# Altium PCB Adafruit Trellis 4x4 3mm HT16K33.PcbDoc
Units mil, origin at the board's own origin, x right, y up, seen from the top; angles counter-clockwise.
Board outline 2362.2 x 2362.2 mil, 2 copper layers (Top, Bottom), stack 61.811 mil thick; 42 components, 39 nets, 187 pads, 63 vias.
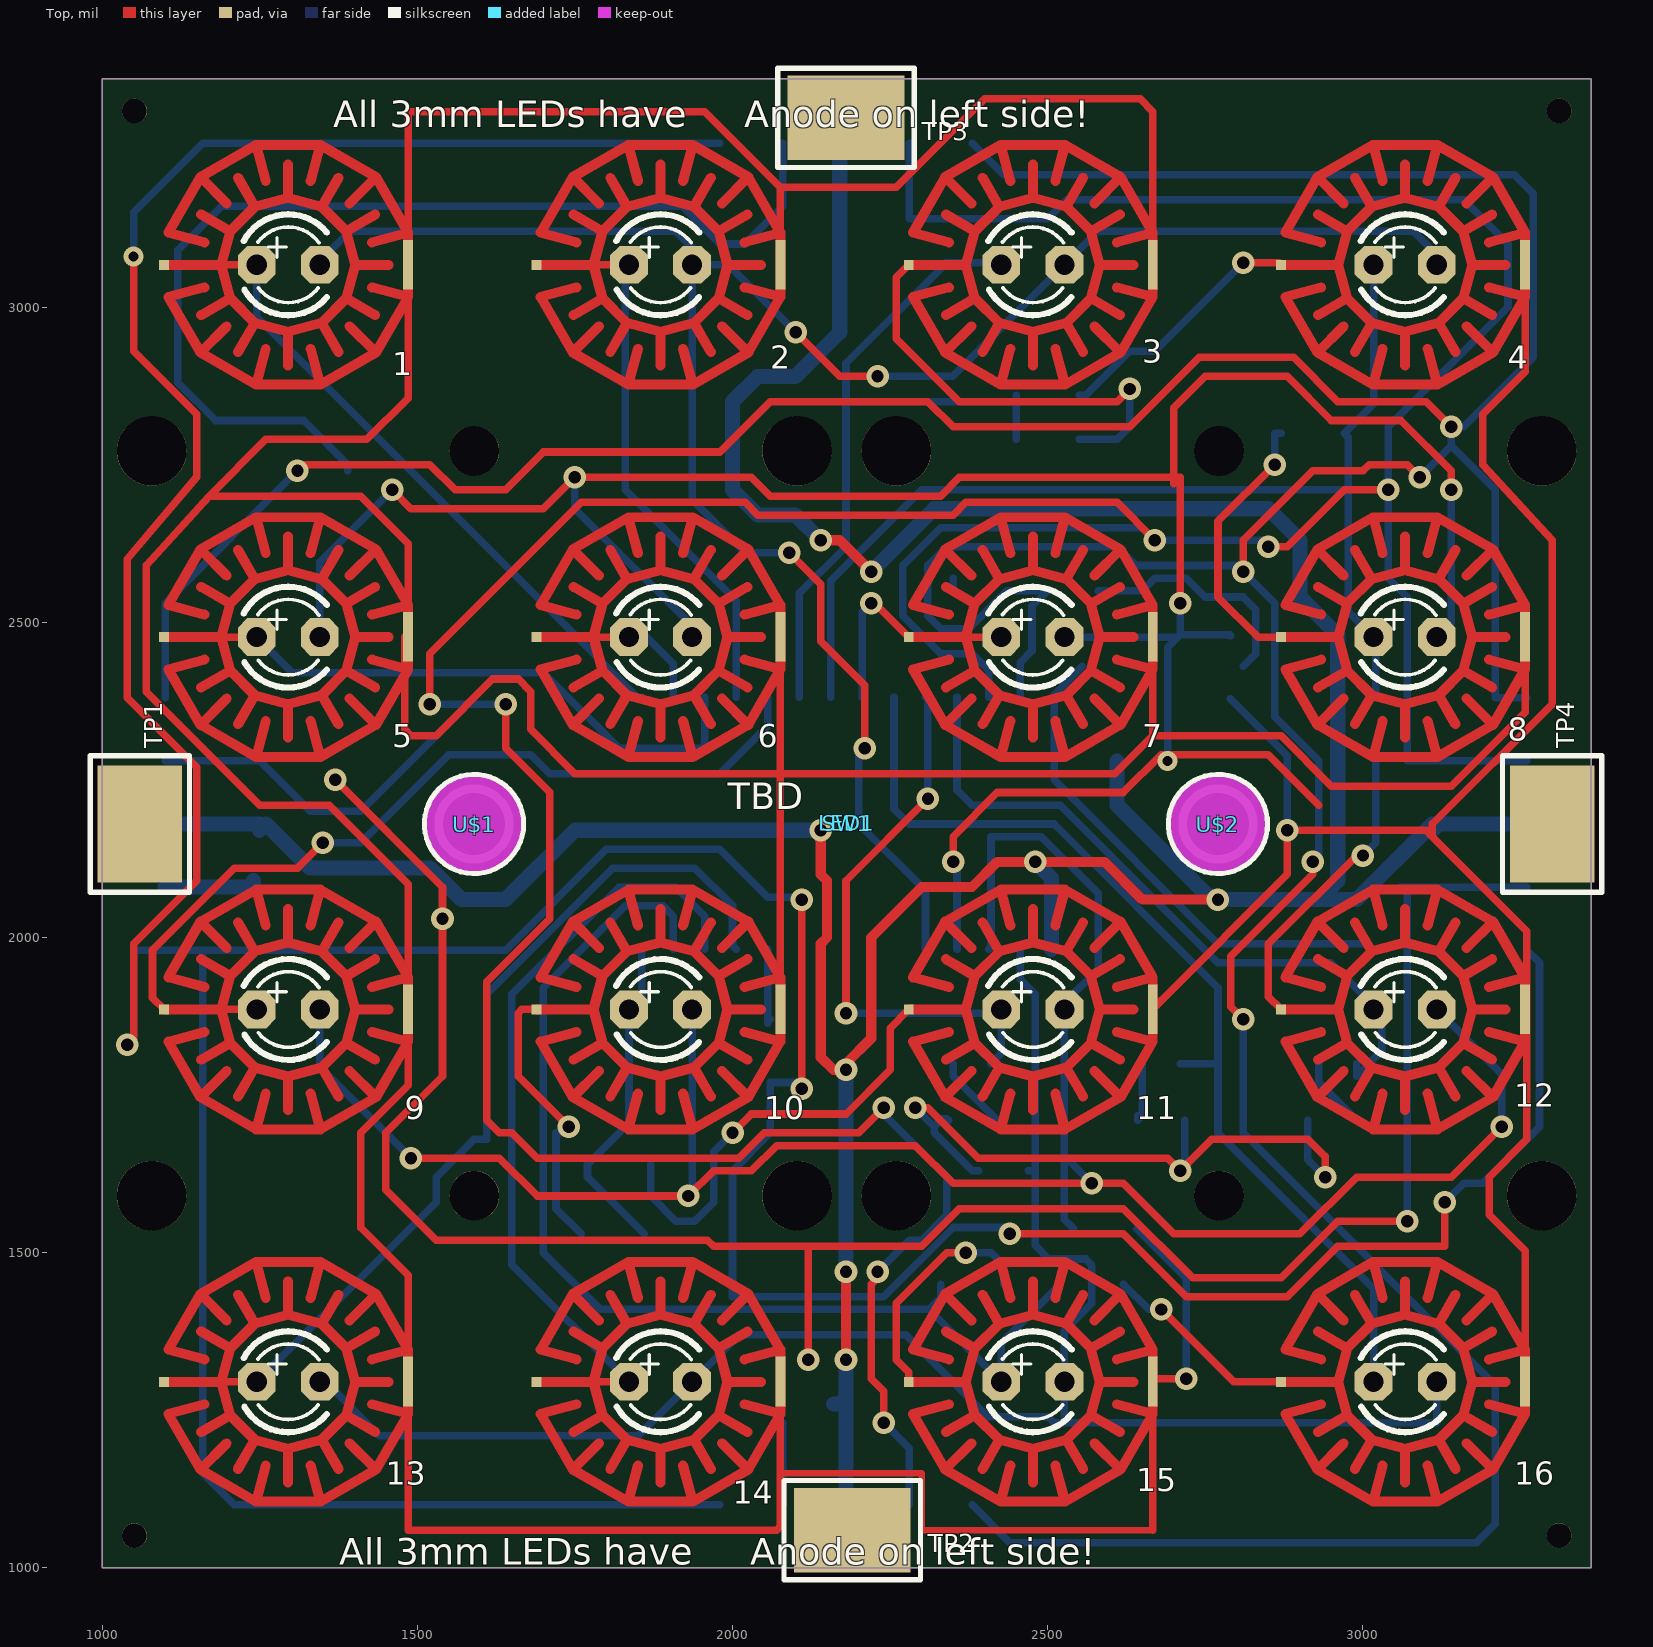
[diagram p0: Top view]
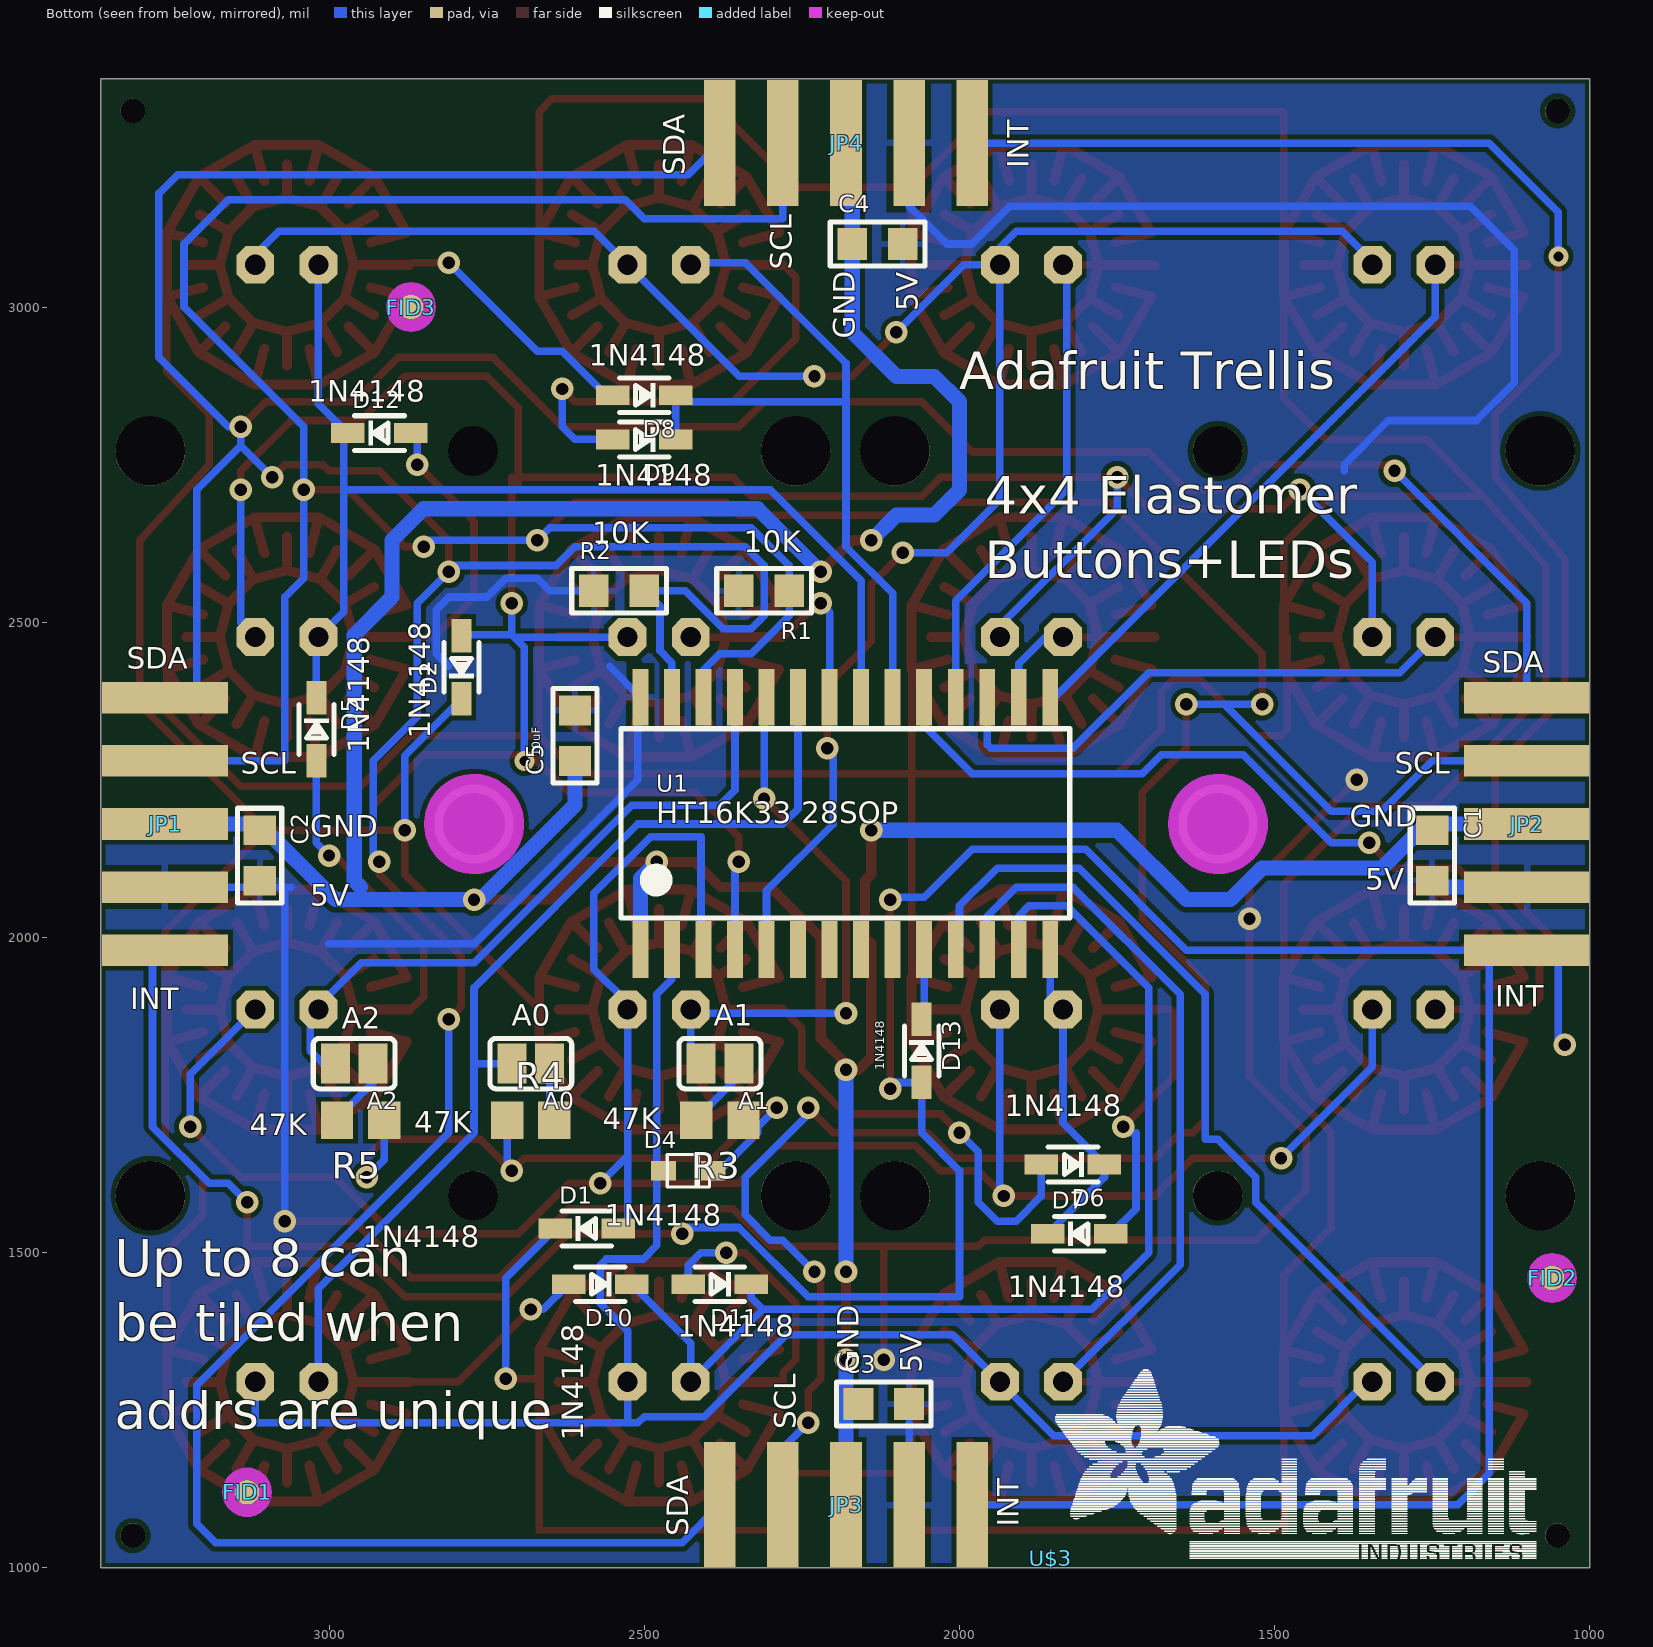
[diagram p1: Bottom view, seen from below]

## Layer stack, top to bottom
Top Solder: solder mask 0.4, Solder Resist, Dk 3.5
Top: signal copper 1.378
Dielectric 1: core 59.0551, FR-4, Dk 4.8
Bottom: signal copper 1.378
Bottom Solder: solder mask 0.4, Solder Resist, Dk 3.5

## Board outline
1000,1000 3362.2,1000 3362.2,3362.2 1000,3362.2

## Design rules (kind name [scope] priority, off if disabled: settings)
Clearance [All] p1: gap=8 except(0: SMDPad-SMDPad SMDPad-THPad SMDPad-Via)
Clearance "Clearance (Same Net)" [All] p2: gap=0 except(8: SMDPad-SMDPad SMDPad-THPad SMDPad-Via)
HoleSize HoleSize_1 [All] p1: absolutevalues=TRUE maxlimit=100000 minlimit=15.5 maxpercent=80.000 minpercent=20.000
HoleSize [All] p2: absolutevalues=TRUE maxlimit=100 minlimit=1 maxpercent=80.000 minpercent=20.000
HoleToHoleClearance mdViaViaSameLayer [All] p1: gap=8 allowstackedmicrovias=TRUE
HoleToHoleClearance [All] p2: gap=10 allowstackedmicrovias=TRUE
PasteMaskExpansion mlMinCreamFrame [All] p1: expansion=0
PasteMaskExpansion [All] p2: expansion=0
PolygonConnect ThermalVias [IsVia] p1: connectstyle=Direct reliefconductorwidth=10 reliefentries=4 polygonreliefangle="90 Angle" airgapwidth=10
PolygonConnect [All] p2: connectstyle=Relief reliefconductorwidth=10 reliefentries=4 polygonreliefangle="90 Angle" airgapwidth=10
RoutingVias [All] p1: holewidth=28 width=50 viastyle="Through Hole" minholewidth=28 minwidth=50 maxholewidth=28 maxwidth=50
SilkToSilkClearance [All] p1 off: silktosilkclearance=10
SilkToSolderMaskClearance [IsPad] p1 off: minsilkscreentomaskgap=10 clearancetoexposedcopper=TRUE
SolderMaskExpansion mlMinStopFrame [All] p1: expansion=4
SolderMaskExpansion [All] p2: expansion=4
Width Width_1 [All] p1: maxlimit=100000 minlimit=8 preferedwidth=10
Width [All] p2: maxlimit=10 minlimit=10 preferedwidth=10
25 further rules are at their usual default settings.

## Components (designator, comment, footprint, x,y, rotation, side; value= is the part's Value field where it differs from the comment)
A0 "" SOLDERJUMPER_REFLOW_NOPASTE 2680,1800 r0 bottom
A1 "" SOLDERJUMPER_REFLOW_NOPASTE 2380,1800 r0 bottom
A2 "" SOLDERJUMPER_REFLOW_NOPASTE 2960,1800 r0 bottom
C1 "" _0805 1250,2130 r270 bottom
C2 "" _0805 3110,2130 r270 bottom
C3 "" _0805 2120,1260 r180 bottom
C4 "" _0805 2130,3100 r180 bottom
C5 "10uF" _0805 2610,2320 r90 bottom
D1 "1N4148" SOD-323 2591.34,1538.27 r180 bottom
D2 "1N4148" SOD-323 2789.84,2428.66 r90 bottom
D4 "1N4148" SOD-323F 2430,1630 r180 bottom
D5 "1N4148" SOD-323 3020,2330 r270 bottom
D6 "1N4148" SOD-323 1820,1640 r0 bottom
D7 "1N4148" SOD-323 1810,1530 r180 bottom
D8 "1N4148" SOD-323 2500,2860 r0 bottom
D9 "1N4148" SOD-323 2500,2790 r0 bottom
D10 "1N4148" SOD-323 2570,1450 r0 bottom
D11 "1N4148" SOD-323 2380,1450 r0 bottom
D12 "1N4148" SOD-323 2920,2800 r180 bottom
D13 "1N4148" SOD-323 2060,1820 r270 bottom
FID1 "" FIDUCIAL_1MM 3130,1120 r180 bottom
FID2 "" FIDUCIAL_1MM 1060,1460 r180 bottom
FID3 "" FIDUCIAL_1MM 2870,3000 r180 bottom
JP1 "" 1X5_SMT 3260,2180 r90 bottom
JP2 "" 1X5_SMT 1100,2180 r90 bottom
JP3 "" 1X5_SMT 2180,1100 r0 bottom
JP4 "" 1X5_SMT 2180,3260 r0 bottom
LED1 "TBD" LED3MM-4X4GRID 2181.1,2181.1 r180 top
R1 "10K" _0805 2310,2550 r0 bottom
R2 "10K" _0805 2540,2550 r180 bottom
R3 "47K" R0805 2380,1710 r0 bottom
R4 "47K" R0805 2680,1710 r180 bottom
R5 "47K" R0805 2950,1710 r0 bottom
SW1 "" ELAST_PAD_SQUARE_10MM_5.4MM_4X4GRID 2181.1,2181.1 r180 top
TP1 "" TESTPOINT_SMT 1060,2180 r90 top
TP2 "" TESTPOINT_SMT 2190,1060 r0 top
TP3 "" TESTPOINT_SMT 2180,3300 r0 top
TP4 "" TESTPOINT_SMT 3300,2180 r90 top
U1 "HT16K33 28SOP" SOP28_300MIL 2181.1,2181.1 r180 bottom
U$1 "" MOUNTINGHOLE_2.5_PLATED 1590,2180 r0 top
U$2 "" MOUNTINGHOLE_2.5_PLATED 2770,2180 r0 top
U$3 "" ADAFRUIT_TEXT_20MM 1855,1015 r180 bottom

## Footprints (in the part's own frame and the unit in brackets; to place one, negate y for a bottom-side part, rotate by r counter-clockwise, add the part's x,y. Pads: shape width x height; smd on the part's side, far side on the other; paste and mask are expansions set on the pad)
1X5_SMT [mil] "1X5_SMT"
  rect 50x200 smd: 1(-200,0) 2(-100,0) 3(0,0) 4(100,0) 5(200,0)
_0805 [mil] "_0805"
  rect 47.24x51.18 smd: 1(-40,0) 2(40,0)
  silkscreen extent -75,-35 75,35
ADAFRUIT_TEXT_20MM [mil] "ADAFRUIT_TEXT_20MM"
  silkscreen extent 6,0 771,300
ELAST_PAD_SQUARE_10MM_5.4MM_4X4GRID [mm] "ELAST_PAD_SQUARE_10MM_5.4MM_4X4GRID"
  round 1 hole 1: 1(-28.7,28.7) 1(-28.7,-28.7) 1(28.7,28.7) 1(28.7,-28.7)
  round 2.8 hole 2.8: 1(-28,-15) 1(-28,15) 1(-2,15) 1(-2,-15) 1(2,15) 1(2,-15) 1(28,-15) 1(28,15)
  round 2 hole 2: 1(-15,15) 1(-15,-15) 1(15,15) 1(15,-15)
  rect 0.4x0.4 smd: A1(-17.5,-22.5) A2(-2.5,-22.5) A3(12.5,-22.5) A4(27.5,-22.5) A5(-17.5,-7.5) A6(-2.5,-7.5) A7(12.5,-7.5) A8(27.5,-7.5) A9(-17.5,7.5) A10(-2.5,7.5) A11(12.5,7.5) A12(27.5,7.5) A13(-17.5,22.5) A14(-2.5,22.5) A15(12.5,22.5) A16(27.5,22.5)
  rect 0.4x2 smd: B1(-27.33,-22.51) B2(-12.33,-22.51) B3(2.67,-22.51) B4(17.67,-22.51) B5(-27.33,-7.51) B6(-12.33,-7.51) B7(2.67,-7.51) B8(17.67,-7.51) B9(-27.33,7.49) B10(-12.33,7.49) B11(2.67,7.49) B12(17.67,7.49) B13(-27.33,22.49) B14(-12.33,22.49) B15(2.67,22.49) B16(17.67,22.49)
  Top drawing of 752 lines, arcs and shapes, not listed
FIDUCIAL_1MM [mm] "FIDUCIAL_1MM"
  rrect100% 1x1 smd: 1(0,0)
  Top keep-out lines w0.5: 0.75,0 ccw(c0,0) 0,0.75 ccw(c0,0) -0.75,0 ccw(c0,0) 0,-0.75 ccw(c0,0) 0.75,0
LED3MM-4X4GRID [mil] "LED3MM-4X4GRID"
  oct 60x60 hole 32: A1(-835.83,-885.83) A2(-245.28,-885.83) A3(345.28,-885.83) A4(935.83,-885.83) A5(-835.83,-295.28) A6(-245.28,-295.28) A7(345.28,-295.28) A8(935.83,-295.28) A9(-835.83,295.28) A10(-245.28,295.28) A11(345.28,295.28) A12(935.83,295.28) A13(-835.83,885.83) A14(-245.28,885.83) A15(345.28,885.83) A16(935.83,885.83) K1(-935.83,-885.83) K2(-345.28,-885.83) K3(245.28,-885.83) K4(835.83,-885.83) K5(-935.83,-295.28) K6(-345.28,-295.28) K7(245.28,-295.28) K8(835.83,-295.28) K9(-935.83,295.28) K10(-345.28,295.28) K11(245.28,295.28) K12(835.83,295.28) K13(-935.83,885.83) K14(-345.28,885.83) K15(245.28,885.83) K16(835.83,885.83)
  silkscreen extent -947,-966 956,966
MOUNTINGHOLE_2.5_PLATED [mil] "MOUNTINGHOLE_2.5_PLATED"
  round 125.98 hole 98.43: P$1(0,0)
  Top keep-out circle w80: c0,0 r39.37
  Bottom keep-out circle w80: c0,0 r39.37
  silkscreen extent -79,-79 79,79
R0805 [mil] "R0805"
  rect 51.18x59.06 smd: 1(-37.4,0) 2(37.4,0)
SOD-323 [mil] "SOD-323"
  rect 53.15x31.5 smd: A(50,0) C(-50,0)
  silkscreen extent -39,-28 39,28
SOD-323F [mm] "SOD-323F"
  rect 1x0.8 smd: A(-1,0) C(1,0)
  silkscreen extent -0.85,-0.65 0.85,0.65
SOLDERJUMPER_REFLOW_NOPASTE [mil] "SOLDERJUMPER_REFLOW_NOPASTE"
  rect 46x63 smd: 1(-30,0) 2(30,0)
  silkscreen extent -65,-40 65,40
SOP28_300MIL [mil] "SOP28_300MIL"
  rect 25x90 smd: P$1(-325,-200) P$2(-275,-200) P$3(-225,-200) P$4(-175,-200) P$5(-125,-200) P$6(-75,-200) P$7(-25,-200) P$8(25,-200) P$9(75,-200) P$10(125,-200) P$11(175,-200) P$12(225,-200) P$13(275,-200) P$14(325,-200) P$15(325,200) P$16(275,200) P$17(225,200) P$18(175,200) P$19(125,200) P$20(75,200) P$21(25,200) P$22(-25,200) P$23(-75,200) P$24(-125,200) P$25(-175,200) P$26(-225,200) P$27(-275,200) P$28(-325,200)
  silkscreen extent -356,-150 356,150
TESTPOINT_SMT [mm] "TESTPOINT_SMT"
  rect 4.7x3.4 smd: P$1(0,0)
  silkscreen extent -2.75,-2 2.75,2

## Part data
A0 A1 A2: library part SOLDERJUMPER_REFLOW_NOPASTE
C1 C2 C3 C4 C5 R1 R2: library part _0805
D1 D2 D5 D6 D7 D8 D9 D10 D11 D12 D13: library part SOD-323
D4: library part SOD-323F
FID1 FID2 FID3: library part FIDUCIAL_1MM
JP1 JP2 JP3 JP4: library part 1X5_SMT
LED1: library part LED3MM-4X4GRID
R3 R4 R5: library part R0805
SW1: library part ELAST_PAD_SQUARE_10MM_5.4MM_4X4GRID
TP1 TP2 TP3 TP4: library part TESTPOINT_SMT
U1: library part SOP28_300MIL
U$1 U$2: library part MOUNTINGHOLE_2.5_PLATED
U$3: library part ADAFRUIT_TEXT_20MM

## Via types
v1: diameter 35.69/35.69 (per signal layer), hole 19.69, Top to Bottom, 61 vias
v2: diameter 31.5/31.5 (per signal layer), hole 15.5, Top to Bottom, 2 vias

## Nets (pads, with @x,y where several pads share a name; then routed paths per layer and width w, separated by ;. In a path a pad name is that pad's centre, name@x,y a point inside that pad or via, vN(x,y) a via of type N, cw(c..) or ccw(c..) an arc to the next point about the centre after c; other vN are vias at no path point)
COM0: D4.A LED1.K13 LED1.K14 LED1.K15 LED1.K16 U1.P$2 | length 2857.7
  Bottom w12: LED1.K16 1354.72,1295.28 1440,1210 1850.55,1210 LED1.K15 2010.55,1370 2275,1370 2405,1240 2500,1240 2510,1230 2526.38,1230 ; U1.P$2 2456.1,1933.9 2480,1910 D4.A@2480,1630 ; D4.A D4.A@2480,1630 ; LED1.K13 3116.93,1230 2526.38,1230 ; D4.A@2480,1630 2480,1511.65 2501.65,1490 2560,1490 2570,1480 2570,1420 2526.38,1376.38 LED1.K14 2526.38,1230
COM1: D1.A LED1.K9 LED1.K10 LED1.K11 LED1.K12 U1.P$3 | length 3748.6
  Top w12: v1(1490,1650) 1630,1650 1690,1590 v1(1930,1590) 1970,1630 2030,1630 2070,1670 2290,1670 2350,1610 v1(2570,1610) 2620,1610 2700,1530 2900,1530 2990,1620 3140,1620 v1(3220,1700)
  Bottom w12: LED1.K12 1345.28,1795.28 1490,1650.55 v1(1490,1650) ; v1(1930,1590) 1935.83,1595.83 LED1.K11 ; U1.P$3 2410,1985 2410,2160 2490,2160 2580,2070 2580,1950 2526.38,1896.38 LED1.K10 2526.38,1653.62 ; D1.A 2526.38,1553.23 2526.38,1653.62 ; v1(2570,1610) 2526.38,1653.62 ; LED1.K9 3220,1782.76 v1(3220,1700)
COM2: D2.A LED1.K5 LED1.K6 LED1.K7 LED1.K8 U1.P$4 | length 4427
  Top w12: v1(1460,2710) 1490,2680 1700,2680 v1(1750,2730) 2030,2730 2060,2700 2330,2700 2360,2730 2710,2730 ; v1(2350,2120) 2350,2160 2420,2230 2620,2230 2680,2290 v2@2690,2290 ; v2(2690,2280) v2@2690,2290 ; v1(2710,2530) 2710,2730 ; 2930,2210 2850,2290 v2@2690,2290 ; v1(3140,2710) 3140,2740 3060,2820 2950,2820 2880,2890 2750,2890 2700,2840 2700,2720 2710,2730
  Bottom w12: LED1.K8 1345.28,2595.28 v1(1460,2710) ; v1(1750,2730) 1750,2680 1935.83,2494.17 LED1.K7 ; v1(2350,2120) 2356.1,2113.9 U1.P$4 ; LED1.K6 2706.38,2476.38 ; v2(2690,2280) 2690,2460 2706.38,2476.38 ; v1(2710,2530) 2710,2480 ; D2.A 2788.5,2480 2710,2480 ; LED1.K5 3140,2499.45 v1(3140,2710) ; 2706.38,2476.38 2710,2480
COM3: LED1.K1 LED1.K2 LED1.K3 LED1.K4 U1.P$5 | length 3330.6
  Top w12: v1(2090,2610) 2140,2560 2140,2470 2210,2400 v1(2210,2300) ; v1(2100,2960) 2170,2890 v1(2230,2890)
  Bottom w12: LED1.K4 1340,3066.93 1393.07,3120 1910,3120 1935.83,3094.17 LED1.K3 ; v1(2090,2610) 2020,2610 1935.83,2694.17 LED1.K3 ; v1(2100,2960) 1993.07,3066.93 LED1.K3 ; v1(2210,2300) 2200,2290 2200,2180 2306.1,2073.9 U1.P$5 ; v1(2230,2890) 2349.45,2890 LED1.K2 2579.45,3120 3080,3120 3116.93,3083.07 LED1.K1
GND: C1.1 C2.1 C3.1 C4.1 C5.1 JP1.3 JP2.3 JP3.3 JP4.3 U1.P$1 | length 6397.5
  Top w16: v1(2140,2170) 2140,2100 2150,2090 2150,2000 2140,1990 2140,1810 2160,1790 v1(2180,1790) 2180,1800 2220,1840 2220,2000 2300,2080 2380,2080 2420,2120 v1(2480,2120) 2590,2120 2650,2060 v1(2770,2060) ; v1(2140,2630) 2170,2630 v1(2220,2580) ; v1(2180,1330) v1(2180,1470)
  Bottom w12: C1.1@1250,2180 C1.1@1260,2180 ; JP4.3@2170,3250 JP4.3
  Bottom w16: 2950,2060 2950,2080
  Bottom w24: JP2.3 1250,2180 C1.1 ; C1.1@1260,2180 1330,2110 1520,2110 1570,2060 1640,2060 1750,2170 v1(2140,2170) ; v1(2140,2630) 2100,2670 2040,2670 2000,2710 2000,2850 2040,2890 2100,2890 2170,2960 C4.1 JP4.3@2170,3250 ; C3.1 2170,1260 C3.1@2180,1270 ; JP3.3 C3.1@2180,1270 ; v1(2180,1330) C3.1@2180,1270 ; v1(2180,1470) v1(2180,1790) ; v1(2220,2580) 2320,2680 2850,2680 2900,2630 2900,2540 2960,2480 2960,2090 2950,2080 ; v1(2480,2120) 2506.1,2093.9 U1.P$1 ; C5.1 2610,2210 2760,2060 v1(2770,2060) 2950,2060 2990,2060 3110,2180 C2.1@3120,2180 ; C2.1 C2.1@3120,2180 ; JP1.3 C2.1@3120,2180
INT: D13.A JP1.1 JP2.1 JP3.1 JP4.1 | length 7983.9
  Top w12: v1(1040,1830) 1050,1840 1050,1990 1150,2090 1150,2270 1040,2380 1040,2600 1150,2730 1150,2830 1050,2930 v2(1050,3080) ; v1(2110,1760) v1(2110,2060) ; v1(2440,1530) 2620,1530 2720,1430 2880,1430 2960,1510 3130,1510 v1(3130,1580)
  Bottom w12: v1(1040,1830) 1050,1840 1050,1980 JP2.1 JP2.1@1160,1980 ; v2(1050,3080) 1050,3150 1160,3260 JP4.1 ; JP3.1 1210,1100 1160,1150 JP2.1@1160,1980 ; v1(2110,1760) 2100,1770 D13.A 2060,1690 2000,1630 2000,1430 2240,1430 2350,1540 2430,1540 v1(2440,1530) ; v1(2110,2060) 2106.1,2063.9 2056.1,2063.9 1980,2140 1800,2140 1640,1980 JP2.1@1160,1980 ; v1(3130,1580) 3160,1610 3190,1610 3280,1700 3280,1960 JP1.1
N$1: D2.C SW1.B1 SW1.B9 SW1.B10 SW1.B13 | length 2898.3
  Top w12: SW1.B10@2666.54,1896.54 SW1.B10 2680,1899.68 2680,1900 2880,2100 v1(2880,2170) 3100,2170 3110,2160 ; SW1.B13 3257.09,1502.91 3200,1560 3200,1620 3260,1680 3260,1883.31 SW1.B9 3260,1886.22 3260,2010 3110,2160 ; SW1.B1 3257.09,2897.09 3190,2830 3190,2750 3300,2630 3300,2370 3110,2180 3110,2160
  Bottom w12: D2.C 2880,2288.5 v1(2880,2170)
N$2: D13.C U1.P$10 | length 121.1
  Bottom w12: D13.C@2056.1,1863.9 D13.C@2056.1,1870 ; U1.P$10 D13.C@2056.1,1870 ; D13.C D13.C@2056.1,1870
N$3: D5.A SW1.A9 | length 478.8
  Top w12: SW1.A9 2850,1905.91 2850,1990 2990,2130 v1(3000,2130)
  Bottom w12: v1(3000,2130) 3020,2150 D5.A
N$4: D6.A SW1.A10 | length 700.9
  Top w12: v1(2000,1690) 2030,1720 2180,1720 2250,1790 2250,1856.3 SW1.A10
  Bottom w12: D6.A 1870,1590 1910,1550 1940,1550 1970,1580 1970,1660 v1(2000,1690)
N$5: D1.C SW1.B2 SW1.B3 SW1.B4 SW1.B5 SW1.B6 SW1.B7 SW1.B8 SW1.B11 SW1.B12 SW1.B14 SW1.B15 SW1.B16 | length 10075.5
  Top w10: 2075.98,1150 2300,1150 2300,1060 2666.54,1060
  Top w12: SW1.B15 2075.98,1150 2075.98,1065.98 2070,1060 1485.43,1060 SW1.B16 1485.43,1464.57 1410,1540 1410,1690 1485.43,1765.43 SW1.B12 1485.43,2084.57 1360,2210 1250,2210 1070,2390 1070,2590 1170,2700 ; SW1.B11 2075.98,2260 ; SW1.B7 2075.98,2260 ; SW1.B3 2075.98,3190 ; 2666.54,1060 SW1.B14 2670.87,1300 v1(2720,1300) ; SW1.B6 2666.54,2320 ; SW1.B2 2666.54,3310 2646.54,3330 2400,3330 2260,3190 2075.98,3190 ; SW1.B5 3257.09,2357.09 3140,2240 2950,2240 2870,2320 2666.54,2320 ; 1170,2700 1260,2790 1420,2790 1485.43,2855.43 SW1.B4 1485.43,3310 1955.98,3310 2075.98,3190 ; 1170,2700 1410,2700 1485.43,2624.57 SW1.B8 1480,2476.77 1480,2330 1490,2320 1530,2320 1620,2410 1660,2410 1680,2390 1680,2330 1750,2260 2075.98,2260 ; 2075.98,2260 2606.54,2260 2666.54,2320
  Bottom w12: D1.C 2720,1459.61 v1(2720,1300)
N$6: D7.A SW1.A11 | length 451.1
  Top w12: SW1.A11 1665.83,1885.83 1660,1880 1660,1780 v1(1740,1700)
  Bottom w12: v1(1740,1700) 1740,1690 1720,1690 1720,1570 D7.A
N$7: D8.A SW1.A1 | length 408.3
  Top w12: v1(2810,3070) 2867.01,3070 SW1.A1
  Bottom w12: D8.A 2560,2860 2630,2930 2670,2930 v1(2810,3070)
N$8: D9.A SW1.A2 | length 693
  Top w12: SW1.A2 2260,3047.4 2260,2950 2360,2850 2610,2850 v1(2630,2870)
  Bottom w12: D9.A 2610,2790 2630,2810 v1(2630,2870)
N$9: A2.1 R5.2 | length 113.8
  Bottom w12: A2.1 2930,1770 2987.4,1712.6 R5.2
N$10: D10.A SW1.A13 | length 314.2
  Top w12: v1(2680,1410) 2794.72,1295.28 SW1.A13
  Bottom w12: D10.A 2660,1410 v1(2680,1410)
N$11: D11.A SW1.A14 | length 374.2
  Top w12: SW1.A14 2279.53,1310.47 2260,1330 2260,1420 2340,1500 v1(2370,1500)
  Bottom w12: v1(2370,1500) 2410,1500 2430,1480 D11.A
N$12: D12.A SW1.A5 | length 433.7
  Top w12: v1(2860,2750) 2770,2660 2770,2540 2833.62,2476.38 SW1.A5
  Bottom w12: v1(2860,2750) 2860,2800 D12.A
N$16: D4.C R3.1 R4.1 R5.1 | length 1117.3
  Top w12: v1(2290,1730) 2310,1730 2390,1650 2690,1650 v1(2710,1630) 2760,1680 2912.6,1680 2940,1652.6 v1(2940,1620)
  Bottom w12: v1(2290,1730) R3.1@2320,1700 ; R3.1 2340,1712.6 2332.6,1712.6 R3.1@2320,1700 ; D4.C 2380,1630 2320,1690 R3.1@2320,1700 ; v1(2710,1630) 2717.4,1637.4 R4.1 ; R5.1 2912.6,1647.4 v1(2940,1620)
N$19: A1.1 R3.2 | length 117.9
  Bottom w12: A1.1 2350,1780 2417.4,1712.6 R3.2
N$20: A0.1 R4.2 | length 100.5
  Bottom w12: R4.2@2642.6,1717.4 R4.2 2650,1717.4 A0.1
R0: A2.2 LED1.A9 U1.P$25 | length 1106.2
  Bottom w12: U1.P$25 2356.1,2233.9 2380,2210 2520,2210 2770,1960 2948.9,1960 3020,1888.9 LED1.A9 3030,1872.76 3030,1820 2990,1780 A2.2
R1: A1.2 LED1.A10 U1.P$24 | length 901.4
  Top w12: v1(2180,1880) 2180,2090 v1(2310,2220)
  Bottom w12: v1(2180,1880) 2426.38,1880 LED1.A10 2426.38,1816.38 A1.2 ; U1.P$24 2310,2377.2 v1(2310,2220)
R2: A0.2 LED1.A13 U1.P$23 | length 1595.7
  Bottom w12: U1.P$23 2256.1,2203.9 2280,2180 2510,2180 2770,1920 2770,1800 ; A0.2 2770,1800 ; LED1.A13 3016.93,1443.07 2770,1690 2770,1800
R3: LED1.A6 SW1.A6 U1.P$22 | length 391.6
  Top w12: v1(2220,2530) 2220,2535.91 SW1.A6 LED1.A6
  Bottom w12: U1.P$22 2206.1,2516.1 v1(2220,2530)
R4: D5.C D12.C LED1.A1 LED1.A5 U1.P$21 | length 1792.5
  Bottom w12: U1.P$21 2156.1,2566.1 2300,2710 2976.93,2710 ; LED1.A1 3016.93,2846.93 D12.C 2976.93,2793.07 2976.93,2710 ; D5.C 3020,2473.31 LED1.A5 2976.93,2516.38 2976.93,2710
R5: D8.C D9.C LED1.A2 U1.P$20 | length 1213.8
  Bottom w12: U1.P$20 2106.1,2546.1 2180,2620 2180,2850 ; LED1.A2 2423.31,3070 2339.45,3070 2180,2910.55 2180,2850 ; D9.C D8.C@2450,2850 ; D8.C D8.C@2450,2850 ; 2180,2850 D8.C@2450,2850
R6: LED1.A12 SW1.A12 U1.P$19 | length 1449.6
  Top w12: LED1.A12 SW1.A12 1080,1904.25 1080,1980 1210,2110 1310,2110 v1(1350,2150)
  Bottom w12: LED1.A12@1240,1891.1 LED1.A12 ; v1(1350,2150) 1410,2150 1550,2290 1680,2290 1710,2260 1980,2260 2056.1,2336.1 U1.P$19
R7: LED1.A3 SW1.A3 U1.P$18 | length 908
  Top w12: SW1.A3 LED1.A3
  Bottom w12: LED1.A3 1830,3061.1 1830,2710 2006.1,2533.9 U1.P$18
R8: LED1.A8 SW1.A8 U1.P$17 | length 1073.3
  Top w12: SW1.A8 LED1.A8
  Bottom w12: LED1.A8 1301.65,2420 1700,2420 1820,2300 1950,2300 1956.1,2306.1 U1.P$17 1956.1,2316.1
R9: LED1.A7 SW1.A7 U1.P$16 | length 290.5
  Top w12: SW1.A7 LED1.A7
  Bottom w12: LED1.A7 1839.45,2480 1860,2480 1906.1,2433.9 U1.P$16
R10: LED1.A4 SW1.A4 U1.P$15 | length 1090.8
  Top w12: SW1.A4 LED1.A4
  Bottom w12: LED1.A4 1245.28,2984.72 1850,2380 1855,2380 U1.P$15
R11: D6.C D7.C LED1.A11 U1.P$14 | length 524
  Bottom w12: U1.P$14 1856.1,1906.1 LED1.A11 1835.83,1705.83 D6.C 1770,1620 D7.C
R12: D10.C D11.C LED1.A14 U1.P$13 | length 1791.7
  Bottom w12: U1.P$13 1906.1,2033.9 1890,2050 1830,2050 1700,1920 1700,1500 1790,1410 2311.65,1410 ; D11.C 2330,1428.35 2311.65,1410 ; D10.C 2426.38,1356.38 LED1.A14 2311.65,1410
R13: LED1.A15 SW1.A15 U1.P$12 | length 1287
  Top w12: SW1.A15 LED1.A15
  Bottom w12: LED1.A15 1650,1481.1 1650,1910 1820,2080 1910,2080 1956.1,2033.9 U1.P$12
R14: LED1.A16 SW1.A16 U1.P$11 | length 1493.5
  Top w12: SW1.A16 LED1.A16
  Bottom w12: LED1.A16 1530,1580 1530,1620 1590,1680 1610,1680 1610,1910 1810,2110 1940,2110 2000,2050 2000,1987.2 U1.P$11
SCL: JP1.4 JP2.4 JP3.4 JP4.4 R1.1 U1.P$26 | length 7602.2
  Top w12: v1(1520,2370) 1520,2450 1760,2690 2020,2690 2040,2670 2350,2670 2370,2690 2610,2690 v1(2670,2630) ; v1(1640,2370) 1640,2300 1710,2230 1710,2030 1610,1930 1610,1710 1630,1690 1650,1690 1690,1650 2010,1650 2050,1690 2200,1690 v1(2240,1730) ; v1(2230,1470) 2230,1460 2220,1450 2220,1300 2240,1280 v1(2240,1230) ; v1(2850,2620) 2880,2620 2970,2710 v1(3040,2710)
  Bottom w12: JP2.4 1250,2280 1330,2200 1410,2200 1580,2370 ; v1(1520,2370) 1580,2370 ; v1(1640,2370) 1580,2370 ; v1(2230,1470) 2280,1520 2300,1520 2340,1560 2340,1620 2240,1720 v1(2240,1730) ; v1(2240,1230) 2280,1190 JP3.4 ; JP4.4 2280,3140 2500,3140 2530,3170 3160,3170 3230,3100 3230,3000 3040,2810 v1(3040,2710) 3040,2570 3070,2540 3070,2280 JP1.4 ; U1.P$26 2406.1,2423.9 2380,2450 2330,2450 2270,2510 R1.1 2270,2590 2330,2650 2650,2650 v1(2670,2630) 2840,2630 v1(2850,2620)
SDA: JP1.5 JP2.5 JP3.5 JP4.5 R2.2 U1.P$27 | length 8467.9
  Top w12: v1(1310,2740) 1320,2750 1520,2750 1560,2710 1640,2710 1700,2770 1980,2770 2060,2850 2310,2850 2350,2810 2630,2810 2740,2920 2890,2920 2960,2850 3100,2850 v1(3140,2810) ; v1(2810,1870) 2790,1890 2790,1970 2920,2100 v1(2920,2120) ; v1(2810,2580) 2810,2630 2920,2740 3000,2740 3010,2750 3070,2750 v1(3090,2730)
  Bottom w12: JP2.5 1100,2530 v1(1310,2740) ; JP3.5 2440,1040 3180,1040 3210,1070 3210,1290 2810,1690 v1(2810,1870) ; JP4.5 2430,3210 3240,3210 3270,3180 3270,2920 3160,2810 v1(3140,2810) 3140,2780 ; U1.P$27 2456.1,2436.1 2475,2455 2475,2525 R2.2 2435,2550 2375,2490 2330,2490 2310,2510 2310,2590 2340,2620 2610,2620 2640,2590 2800,2590 v1(2810,2580) 2860,2530 2860,2350 2930,2280 2930,2130 v1(2920,2120) ; v1(3090,2730) 3140,2780 ; JP1.5 3210,2380 3210,2710 3140,2780
VCC: C1.2 C2.2 C3.2 C4.2 C5.2 JP1.2 JP2.2 JP3.2 JP4.2 R1.2 R2.1 U1.P$28 | length 6596.2
  Top w12: v1(1370,2250) 1540,2080 v1(1540,2030) 1540,1780 1450,1690 1450,1600 1530,1520 1960,1520 1970,1510 2120,1510 ; v1(2120,1330) 2120,1510 ; v1(3070,1550) 2960,1550 2870,1460 2730,1460 2620,1570 2360,1570 2300,1510 2120,1510
  Bottom w12: 1390,2740 1390,2750 1320,2820 1180,2820 1120,2880 1120,3090 1190,3160 1920,3160 1980,3100 2020,3100 2080,3160 JP4.2 ; JP3.2 2080,1230 ; R1.2 R1.2@2350,2570 ; 2555,2430 U1.P$28 2510,2377.2 2510,2250 2770,1990 3000,1990 ; R2.1 2650,2550 2670,2570 2720,2570 2750,2540 2810,2540 2830,2520 2830,2450 2810,2430 ; 3060,2080 3080,2080 ; v1(3070,1550) 3070,2070 3080,2080 ; JP1.2 3080,2080
  Bottom w24: JP2.2 1240,2080 C1.2@1240,2090
pads on no net: FID1.1 FID2.1 FID3.1 SW1.1 TP1.P$1 TP2.P$1 TP3.P$1 TP4.P$1 U1.P$6 U1.P$7 U1.P$8 U1.P$9 U$1.P$1 U$2.P$1

## Polygon pours and split planes (outlines as drawn)
VCC on Bottom "Bottom-VCC" (solid, remove dead copper, pour order 0): 965,3375 965,985 3385,985 3385,3375

## Keep-outs
Keep-Out Layer:
  the board outline again, w0

## Silkscreen, mask and mechanical layers (free items; w line width, h text height)
Top Overlay:
  text "All 3mm LEDs have     Anode on left side!" at 1366.42,3285.12 h42.5
  text "3" at 2650,2900 h62
  text "2" at 2060,2890 h62
  text "4" at 3230,2890 h62
  text "1" at 1460,2880 h62
  text "8" at 3230,2300 h62
  text "5" at 1460,2290 h62
  text "6" at 2040,2290 h62
  text "7" at 2650,2290 h62
  text "12" at 3240,1720 h62
  text "9" at 1480,1700 h62
  text "10" at 2050,1700 h62
  text "11" at 2640,1700 h62
  text "13" at 1450,1120 h62
  text "16" at 3240,1120 h62
  text "15" at 2640,1110 h62
  text "14" at 2000,1090 h62
  text "All 3mm LEDs have     Anode on left side!" at 1376.42,1005.12 h42.5
Bottom Overlay:
  text "INT" at 1890,3220 h34 r270
  text "SDA" at 2436.01,3209.36 h34 r270
  text "SCL" at 2266.01,3059.36 h34 r270
  text "5V" at 2066.01,2993.35 h34 r270
  text "GND" at 2166.01,2949.36 h34 r270
  text "Adafruit Trellis" at 2000,2850 h102.3
  text "4x4 Elastomer" at 1960,2652.3 h102.3
  text "Buttons+LEDs" at 1960,2550 h102.3
  text "SDA" at 3320.64,2426.01 h34
  text "SDA" at 1170,2420 h34
  text "SCL" at 1310,2260 h34
  text "SCL" at 3140,2260 h34
  text "GND" at 1380.64,2176.01 h34
  text "GND" at 3030,2160 h34
  text "5V" at 1356.65,2076.01 h34
  text "5V" at 3030,2050 h34
  text "INT" at 1150,1890 h34
  text "INT" at 3314.97,1886.01 h34
  text "A1" at 2390,1860 h34
  text "A0" at 2710,1860 h34
  text "A2" at 2980,1855 h34
  text "Up to 8 can" at 3340,1442.3 h102.3
  text "be tiled when" at 3340,1340 h102.3
  text "5V" at 2060,1310 h34 r270
  text "GND" at 2160,1310 h34 r270
  text "SCL" at 2260,1220 h34 r270
  text "addrs are unique" at 3340,1200 h102.3
  text "INT" at 1906.01,1065.03 h34 r270
  text "SDA" at 2430,1050 h34 r270
Dimension:
  the board outline again, w0